# EAGLE board board (EAGLE 9.6.2)

Size 163.81 x 136.83 mm. Coordinates in mm from the lower left corner, seen from the top.
Outline: 3.81,0 163.81,0 163.81,100 0,136.83 3.81,0
Copper layers (1*16): Top 0.035mm / dielectric 1.5mm / Bottom 0.035mm
Design rules "default": minimum track width 6mil, minimum drill 0.35mm, track to track 6mil, track to pad 6mil, pad to pad 6mil, via to via 6mil, smd to smd 6mil, copper to edge 40mil, drill to drill 6mil, minimum pad ring 10mil, minimum via ring 8mil, stop-mask expansion 4mil, vias tented up to drill 0mil, thermal gap 10mil

## Footprints (pad centres in the part's own frame; a part is rotated, then mirrored left to right if it is on the bottom)
C0805 = smd 1.3 x 1.5: 1 -0.95,0; 2 0.95,0
CAPACITOR_100UF_50V = drill 0.7 square: + 1.75,0; - -1.75,0
TE_6-PIN = drill 1.5 square: 1 4.14,11.48; 2 0,11.48; 3 -4.14,11.48; 4 4.14,7.34; 5 0,7.34; 6 -4.14,7.34 | hole 3.91: 0,0
1X02 = drill 1.016 pad 1.88: 1 0,0; 2 2.54,0
DO214AA = smd 1.8 x 2.2: A 2.55,0; C -2.55,0
A122645-ND = drill 1 square: P$1 3.58,2.54 | drill 1: P$2 2.56,4.32; P$3 1.54,2.54; P$4 0.52,4.32; P$5 -0.5,2.54; P$6 -1.52,4.32; P$7 -2.54,2.54; P$8 -3.56,4.32; P$9 -6.86,9.14; P$10 -4.57,9.14; P$11 4.57,9.14; P$12 6.86,9.14 | drill 1.8: P$13 -8.13,3.43; P$14 8.13,3.43 | hole 3.25: -6.35,0; 6.35,0
SO16 = smd 0.66 x 2.032: 1 -4.445,-3.073; 2 -3.175,-3.073; 3 -1.905,-3.073; 4 -0.635,-3.073; 5 0.635,-3.073; 6 1.905,-3.073; 7 3.175,-3.073; 8 4.445,-3.073; 9 4.445,3.073; 10 3.175,3.073; 11 1.905,3.073; 12 0.635,3.073; 13 -0.635,3.073; 14 -1.905,3.073; 15 -3.175,3.073; 16 -4.445,3.073
0805_LED = smd 0.8 x 1.2: 1 -0.9,0; 2 0.9,0
0805 = smd 0.8 x 1.2: 1 -0.9,0; 2 0.9,0
BATTCOM_20MM_PTH = drill 1.3: 1 11.85,0; 2 -8.15,0
TEENSY41 = drill 1: 0-RX1/CS1/CRX2 -27.94,-7.62; 1-TX1/MISO1/CTX2 -25.4,-7.62; 2-OUT2 -22.86,-7.62; 3-LRCLK2 -20.32,-7.62; 4-BCLK2 -17.78,-7.62; 5-IN2 -15.24,-7.62; 6-OUT1D -12.7,-7.62; 7-RX2/OUT1A -10.16,-7.62; 8-TX2/IN1 -7.62,-7.62; 9-OUT1C -5.08,-7.62; 10-CS\MQSR -2.54,-7.62; 11-MOSI/CTX1 0,-7.62; 12-MISO/MQSL 2.54,-7.62; 13-SCK/LED 2.54,7.62; 14-A0/TX3/SPDIF_OUT 0,7.62; 15-A1/RX3/SPDIF_IN -2.54,7.62; 16-A2/RX4/SCL1 -5.08,7.62; 17-A3/TX4/SDA1 -7.62,7.62; 18-A4/SDA0 -10.16,7.62; 19-A5/SCL0 -12.7,7.62; 20-A6/TX5/LRCLK1 -15.24,7.62; 21-A7/RX5/BCLK1 -17.78,7.62; 22-A8/CTX1 -20.32,7.62; 23-A9/CRX1/MCLK1 -22.86,7.62; 24-A10/TX6/SCL2 7.62,-7.62; 25-A11/RX6/SDA2 10.16,-7.62; 26-A12/MOSI1 12.7,-7.62; 27-A13/SCK1 15.24,-7.62; 28-RX7 17.78,-7.62; 29-TX7 20.32,-7.62; 30-CRX3 22.86,-7.62; 31-CTX3 25.4,-7.62; 32-OUT1B 27.94,-7.62; 33-MCLK2 27.94,7.62; 34-RX8 25.4,7.62; 35-TX8 22.86,7.62; 36-PWM 20.32,7.62; 37-PWM 17.78,7.62; 38-A14/CS/IN1 15.24,7.62; 39-A15/CS/OUT1A 12.7,7.62; 40-A16/CS1 10.16,7.62; 41-A17/MISO1 7.62,7.62; +5V -24.13,-4.62; D+ -30.25,-1; D- -30.25,1; DM -21.59,-4.62; DP -19.05,-4.62; GND4 -16.51,-4.62; GND5 -13.97,-4.62; ON/OFF 15.24,5.08; PROGRAM 15.24,2.54; VBAT 15.24,-5.08; VUSB -27.94,5.08 | drill 1 octagon: 3V3-1 5.08,-7.62; 3V3-2 15.24,-2.54; 3V3-3 -25.4,7.62 | drill 0.6: G -15.51,3.08; LED -17.51,3.08; R+ -17.51,5.08; R- -15.51,5.08; T+ -15.51,1.08; T- -17.51,1.08 | drill 1 square: GND1 -30.48,-7.62; GND2 15.24,0; GND3 5.08,7.62; GND6 -27.94,7.62 | drill 1 pad 1.676: VIN -30.48,7.62
DIL08 = drill 0.813 long: 1 -3.81,-3.81; 2 -1.27,-3.81; 3 1.27,-3.81; 4 3.81,-3.81; 5 3.81,3.81; 6 1.27,3.81; 7 -1.27,3.81; 8 -3.81,3.81

## Placement (x,y rotation side)
C1  0.1µF  [C0805]  -80.01,83.82 0 top  (outside the outline)
C2  0.1µF  [C0805]  -86.36,83.82 0 top  (outside the outline)
C3  0.1µF  [C0805]  -92.71,83.82 0 top  (outside the outline)
C4  0.1µF  [C0805]  13.97,127 0 top
C5  0.1µF  [C0805]  -20.32,93.98 0 top  (outside the outline)
C6  0.1µF  [C0805]  -26.67,93.98 0 top  (outside the outline)
C7  0.1µF  [C0805]  -33.02,93.98 0 top  (outside the outline)
C8  0.1µF  [C0805]  -39.37,93.98 0 top  (outside the outline)
C9  0.1µF  [C0805]  -45.72,93.98 0 top  (outside the outline)
C10  0.1µF  [C0805]  -52.07,93.98 0 top  (outside the outline)
C11  0.1µF  [C0805]  -58.42,93.98 0 top  (outside the outline)
C12  0.1µF  [C0805]  -64.77,93.98 0 top  (outside the outline)
C13  0.1µF  [C0805]  -71.12,93.98 0 top  (outside the outline)
C14  0.1µF  [C0805]  -77.47,93.98 0 top  (outside the outline)
C15  0.1µF  [C0805]  -83.82,93.98 0 top  (outside the outline)
C18  0.1µF  [CAPACITOR_100UF_50V]  -13.97,85.09 0 top  (outside the outline)
C19  0.1µF  [C0805]  -90.17,93.98 0 top  (outside the outline)
C20  0.1µF  [C0805]  -13.97,100.33 0 top  (outside the outline)
C21  0.1µF  [CAPACITOR_100UF_50V]  -22.86,85.09 0 top  (outside the outline)
CON1  TE_6-PIN  [TE_6-PIN]  -17.78,6.35 0 top  (outside the outline)
CON4  1X02  [1X02]  -20.32,100.33 0 top  (outside the outline)
D1  [DO214AA]  -26.67,99.06 0 top  (outside the outline)
D2  [DO214AA]  -34.29,99.06 0 top  (outside the outline)
ETH8  ETHERNET  [A122645-ND]  -64.77,6.35 0 top  (outside the outline)
ETH9  ETHERNET  [A122645-ND]  -22.86,29.21 0 top  (outside the outline)
ETH10  ETHERNET  [A122645-ND]  -48.26,29.21 0 top  (outside the outline)
ETH11  ETHERNET  [A122645-ND]  -73.66,29.21 0 top  (outside the outline)
ETH12  ETHERNET  [A122645-ND]  -22.86,48.26 0 top  (outside the outline)
ETH13  ETHERNET  [A122645-ND]  -48.26,48.26 0 top  (outside the outline)
ETH14  ETHERNET  [A122645-ND]  -73.66,48.26 0 top  (outside the outline)
IC1  MAX3232CSE  [SO16]  -35.56,85.09 0 top  (outside the outline)
IC2  MAX3232CSE  [SO16]  -52.07,85.09 0 top  (outside the outline)
IC3  MAX3232CSE  [SO16]  -68.58,85.09 0 top  (outside the outline)
LED1  [0805_LED]  -39.37,99.06 0 top  (outside the outline)
LED2  [0805_LED]  -43.18,99.06 0 top  (outside the outline)
LED3  [0805_LED]  -46.99,99.06 0 top  (outside the outline)
LED4  [0805_LED]  -50.8,99.06 0 top  (outside the outline)
LED5  [0805_LED]  -54.61,99.06 0 top  (outside the outline)
R1  [0805]  -58.42,99.06 0 top  (outside the outline)
R2  [0805]  -62.23,99.06 0 top  (outside the outline)
R3  [0805]  -66.04,99.06 0 top  (outside the outline)
R4  [0805]  -69.85,99.06 0 top  (outside the outline)
R5  [0805]  -73.66,99.06 0 top  (outside the outline)
RTC_BAT1  [BATTCOM_20MM_PTH]  -39.37,11.43 0 top  (outside the outline)
U$1  TEENSY41  [TEENSY41]  -39.37,71.12 0 top  (outside the outline)
U$2  MCP2562DIP-8  [DIL08]  -82.55,67.31 0 top  (outside the outline)

## Library data of the parts
C1-C15 C19 C20 = rcl; SPICEPREFIX: C
C18 C21 R1-R5 = EcoCar-Passives
CON1 = EcoCar-Connectors
CON4 = EcoCar-Connectors-2.54mm
D1 D2 LED1-LED5 = EcoCar-Discrete-Semiconductors
ETH8-ETH14 = ETHERNET
IC1-IC3 = maxim; MPN: MAX3232CSE; OC_FARNELL: 9725490; OC_NEWARK: 90C2890
RTC_BAT1 = SparkFun-Batteries; PROD_ID: BATT-09031; SF_SKU: PRT-00783
U$1 = teensy
U$2 = diy

## Nets
3.3V: C5.1 C14.1 C15.1 C19.1 ETH8.P$9 ETH8.P$11 ETH9.P$9 ETH9.P$11 ETH10.P$9 ETH10.P$11 ETH11.P$9 ETH11.P$11 ETH12.P$9 ETH12.P$11 IC1.16 IC2.16 IC3.16 R3.2 R5.2 U$1.3V3-1 U$1.3V3-2 U$1.3V3-3 U$2.5
5V: C20.1 C21.+ CON1.4 CON1.6 CON4.2 D2.C R1.2 R4.2 U$2.3
12V: C18.+ CON1.1 CON1.3 D1.C R2.2
CANRX: U$1.23-A9/CRX1/MCLK1 U$2.4
CANSTBY: U$1.2-OUT2 U$2.8
CANTX: U$1.22-A8/CTX1 U$2.1
GND: C3.2 C4.1 C5.2 C8.2 C9.1 C10.2 C11.1 C14.2 C15.2 C18.- C19.2 C20.2 C21.- CON1.2 CON1.5 D1.A D2.A ETH8.P$4 ETH8.P$5 ETH9.P$4 ETH9.P$5 ETH10.P$4 ETH10.P$5 ETH11.P$4 ETH11.P$5 ETH12.P$4 ETH12.P$5 ETH13.P$6 ETH14.P$6 IC1.15 IC2.15 IC3.15 LED1.2 LED2.2 LED3.2 LED4.2 LED5.2 RTC_BAT1.2 U$1.GND1 U$1.GND2 U$1.GND3 U$1.GND4 U$1.GND5 U$1.GND6 U$2.2
N$7: U$1.VIN
N$8: ETH13.P$4 ETH14.P$4 U$2.7
N$9: ETH13.P$5 ETH14.P$5 U$2.6
N$10: CON4.1 ETH13.P$3 ETH14.P$3
N$11: ETH9.P$2
N$12: ETH13.P$13 ETH14.P$14
N$13: LED2.1 R2.1
N$14: LED1.1 R1.1
N$15: C1.1 IC2.1
N$16: C1.2 IC2.3
N$17: C2.1 IC2.4
N$18: C2.2 IC2.5
N$19: C3.1 IC2.2
N$20: C4.2 IC2.6
N$21: C6.2 IC1.3
N$22: C7.2 IC1.5
N$23: C6.1 IC1.1
N$24: C7.1 IC1.4
N$25: C8.1 IC1.2
N$26: C9.2 IC1.6
N$27: C10.1 IC3.2
N$28: C11.2 IC3.6
N$29: C12.2 IC3.3
N$30: C13.2 IC3.5
N$31: C12.1 IC3.1
N$32: C13.1 IC3.4
N$33: LED3.1 R3.1
N$34: LED4.1 R4.1
N$35: LED5.1 R5.1
N$43: RTC_BAT1.1 U$1.VBAT
RS_RX1: ETH8.P$6 IC3.8
RS_RX2: ETH9.P$6 IC2.8
RS_RX3: ETH10.P$6 IC1.13
RS_RX4: ETH11.P$6 IC1.8
RS_RX5: ETH12.P$6 IC3.13
RS_TX1: ETH8.P$3 IC3.7
RS_TX2: ETH9.P$3 IC2.7
RS_TX3: ETH10.P$3 IC1.14
RS_TX4: ETH11.P$3 IC1.7
RS_TX5: ETH12.P$3 IC3.14
RX1: ETH8.P$10 IC3.9 U$1.0-RX1/CS1/CRX2
RX2: ETH9.P$10 IC2.9 U$1.7-RX2/OUT1A
RX3: ETH10.P$10 IC1.12 U$1.15-A1/RX3/SPDIF_IN
RX4: ETH11.P$10 IC1.9 U$1.16-A2/RX4/SCL1
RX5: ETH12.P$10 IC3.12 U$1.21-A7/RX5/BCLK1
TX1: ETH8.P$12 IC3.10 U$1.1-TX1/MISO1/CTX2
TX2: ETH9.P$12 IC2.10 U$1.8-TX2/IN1
TX3: ETH10.P$12 IC1.11 U$1.14-A0/TX3/SPDIF_OUT
TX4: ETH11.P$12 IC1.10 U$1.17-A3/TX4/SDA1
TX5: ETH12.P$12 IC3.11 U$1.20-A6/TX5/LRCLK1

## Tracks (layer width: path | path; a pad name or v marks a point on that pad's centre or on a via)
3.3V  (22 unrouted)
5V  (8 unrouted)
12V  (4 unrouted)
CANRX  (1 unrouted)
CANSTBY  (1 unrouted)
CANTX  (1 unrouted)
GND  (44 unrouted)
N$8  (2 unrouted)
N$9  (2 unrouted)
N$10  (2 unrouted)
N$12  (1 unrouted)
N$13  (1 unrouted)
N$14  (1 unrouted)
N$15  (1 unrouted)
N$16  (1 unrouted)
N$17  (1 unrouted)
N$18  (1 unrouted)
N$19  (1 unrouted)
N$20  (1 unrouted)
N$21  (1 unrouted)
N$22  (1 unrouted)
N$23  (1 unrouted)
N$24  (1 unrouted)
N$25  (1 unrouted)
N$26  (1 unrouted)
N$27  (1 unrouted)
N$28  (1 unrouted)
N$29  (1 unrouted)
N$30  (1 unrouted)
N$31  (1 unrouted)
N$32  (1 unrouted)
N$33  (1 unrouted)
N$34  (1 unrouted)
N$35  (1 unrouted)
N$43  (1 unrouted)
RS_RX1  (1 unrouted)
RS_RX2  (1 unrouted)
RS_RX3  (1 unrouted)
RS_RX4  (1 unrouted)
RS_RX5  (1 unrouted)
RS_TX1  (1 unrouted)
RS_TX2  (1 unrouted)
RS_TX3  (1 unrouted)
RS_TX4  (1 unrouted)
RS_TX5  (1 unrouted)
RX1  (2 unrouted)
RX2  (2 unrouted)
RX3  (2 unrouted)
RX4  (2 unrouted)
RX5  (2 unrouted)
TX1  (2 unrouted)
TX2  (2 unrouted)
TX3  (2 unrouted)
TX4  (2 unrouted)
TX5  (2 unrouted)